# Altium PCB NanoVTX_es1.PcbDoc (part 2 of 4)
Units mm, origin at the board's own origin, x right, y up, seen from the top; angles counter-clockwise.
Board outline 40.21 x 28.18 mm, 6 copper layers (Top Layer, GND1, SIGNAL, POWER, GND2, Bottom Layer), stack 0.816 mm thick; 295 components, 218 nets, 1362 pads, 709 vias.
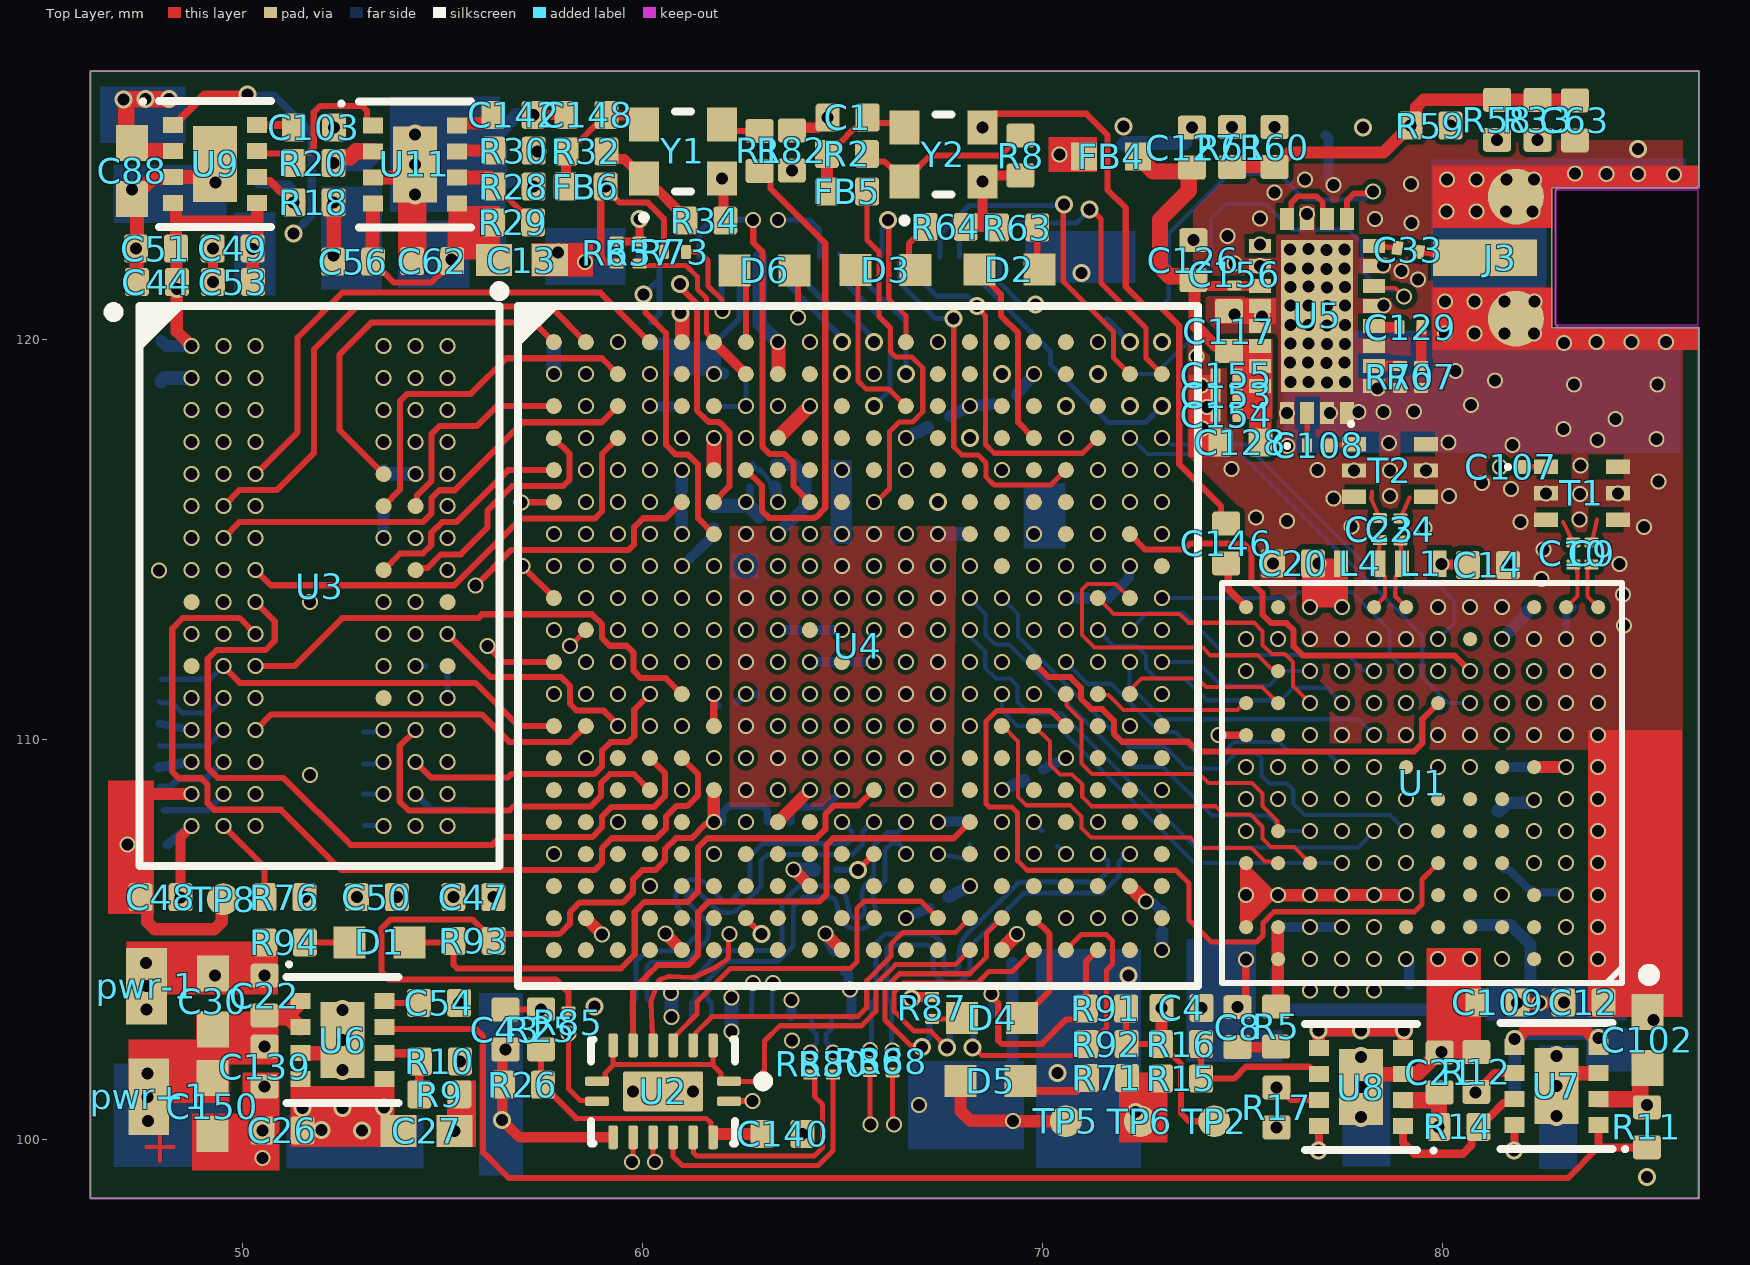
[diagram p0: Top Layer view]

## Via types
v1: diameter 0.4, hole 0.3, Top Layer to Bottom Layer, tented both sides, 609 vias
v2: diameter 0.45, hole 0.3, Top Layer to Bottom Layer, tented both sides, 85 vias
v3: diameter 0.5, hole 0.3, Top Layer to Bottom Layer, tented both sides, 13 vias
v4: diameter 0.5, hole 0.3, Top Layer to Bottom Layer, 2 vias

## Nets (pads, with @x,y where several pads share a name; then routed paths per layer and width w, separated by ;. In a path a pad name is that pad's centre, name@x,y a point inside that pad or via, vN(x,y) a via of type N, cw(c..) or ccw(c..) an arc to the next point about the centre after c; other vN are vias at no path point) (continued)
+1.5: (continued)
  Top Layer w0.305: U9.4@48.34,123.384 48.34,122.935 ; v2(48.364,121.252) C44.1@48.362,121.254 ; v1(48.73,108.624) 47.638,108.624 47.451,108.437 47.451,106.032 47.625,105.858 47.625,105.423 47.803,105.245 49.307,105.245 49.485,105.423 49.485,105.962 TP8.1@49.517,105.994 ; v1(48.73,119.824) 48.361,120.194 C44.1@48.361,121.254 ; C53.1@50.267,121.425 50.263,121.429 50.263,122.246 v2(50.259,122.25) 50.373,122.364 50.373,122.935 ; U9.5@50.373,123.401 50.373,122.935 ; 48.34,122.935 C51.1@48.34,122.261 48.351,122.251 48.351,121.435 C44.1@48.362,121.425 C44.1@48.362,121.254 ; 48.34,122.935 50.373,122.935
  Bottom Layer w0.203: C19.1@47.925,110.389 v1(48.73,110.224)
  Bottom Layer w0.305: C52.1@47.981,119.943 48.1,119.824 v1(48.73,119.824) ; C101.2@50.127,121.883 50.343,122.191 50.35,122.2 v2@50.346,122.203 ; v2@50.279,122.271 v2@50.346,122.203 ; v2@50.35,122.201 50.406,122.257 v2@50.406,122.263 ; R19.1@50.406,122.86 v2@50.406,122.263 ; v1(53.53,115.024) C6.1@53.53,115.692 ; R24.1@60.984,116.202 60.984,116.721 v1(60.987,116.724) ; v2@50.346,122.203 v2@50.406,122.263
  other v1: 52.861,106.045 56.274,106.045 60.187,106.324 57.787,107.124 47.13,107.366 55.131,108.624 60.987,108.724 58.587,109.524 55.13,110.224 59.387,111.924 49.531,112.624 54.33,112.624 49.531,114.224 55.13,114.224 60.187,114.324 57.787,115.124 48.73,115.824 55.13,116.624 49.531,117.424 55.13,117.424 58.587,117.524 48.73,118.224 55.13,118.224 49.531,119.024 54.33,119.824 59.387,119.924